# EAGLE board Ryan's board (EAGLE 5.12)
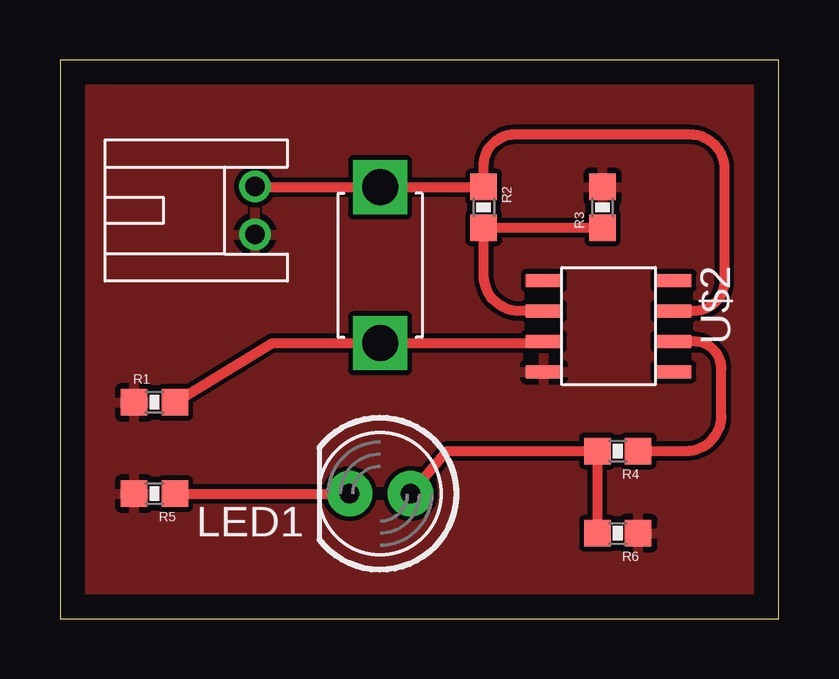
[diagram p0: board, top side]

Size 29.95 x 23.29 mm. Coordinates in mm from the lower left corner, seen from the top.
Outline: 0,0 29.95,0 29.95,23.29 0,23.29 0,0
Copper layers (1*16): Top 0.035mm / dielectric 1.5mm / Bottom 0.035mm
Design rules "default": minimum track width 10mil, minimum drill 24mil, track to track 8mil, track to pad 8mil, pad to pad 8mil, via to via 8mil, smd to smd 8mil, copper to edge 40mil, drill to drill 8mil, minimum pad ring 10mil, minimum via ring 8mil, stop-mask expansion 4mil, vias tented up to drill 0mil, thermal gap 10mil

## Footprints (pad centres in the part's own frame; a part is rotated, then mirrored left to right if it is on the bottom)
JST-2-PH-TH = drill 0.8 round: 1 -1,-6.35; 2 1,-6.35
LED5MM = drill 0.813 pad 1.88 round: A -1.27,0; K 1.27,0
0603 = smd 1.1 x 1.1: 1 -0.85,0; 2 0.85,0
TACTILE_SWITCH = drill 1.5 square: 1 -3.25,0; 2 3.25,0
SOIC = smd 0.55 x 1.5: 1 -1.905,-2.7; 2 -0.635,-2.7; 3 0.635,-2.7; 4 1.905,-2.7; 5 1.905,2.7; 6 0.635,2.7; 7 -0.635,2.7; 8 -1.905,2.7

## Placement (x,y rotation side)
JP1  [JST-2-PH-TH]  1.78,17.02 90 top
LED1  [LED5MM]  13.33,5.21 180 top
R1  1k  [0603]  3.94,9.02 0 top
R2  1k  [0603]  17.65,17.15 270 top
R3  1k  [0603]  22.61,17.15 90 top
R4  100  [0603]  23.24,6.99 180 top
R5  1k  [0603]  3.94,5.21 180 top
R6  1k  [0603]  23.24,3.56 180 top
U$1  TACTILE_SWITCH  [TACTILE_SWITCH]  13.33,14.73 270 top
U$2  UA741UA741-D(R-PDSO-G8)  [SOIC]  22.86,12.19 270 top

## Library data of the parts
JP1 LED1 R1-R6 U$1 = GibbotV5
U$2 = practice

## Nets
GND: JP1.1 R1.1 R3.2 R5.2 R6.1 U$2.4
N$2: JP1.2 R2.1 U$1.1 U$2.7
N$3: R1.2 U$1.2 U$2.3
N$4: R2.2 R3.1 U$2.2
N$5: R4.1 U$2.6
N$6: LED1.A R4.2 R6.2
N$7: LED1.K R5.1

## Tracks (layer width: path | path; a pad name or v marks a point on that pad's centre or on a via)
GND
  pour Top: 0.89,22.61 29.21,22.61 29.21,0.76 0.76,0.76
N$2
  Top 0.406: JP1.2 arc90 8.16,17.98 U$1.1 13.33,17.99 R2.1 17.65,18.88 arc-90 18.96,20.19 26.24,20.19 arc-90 27.69,18.74 27.69,14.08 arc-90 26.43,12.83 U$2.7
N$3
  Top 0.406: U$2.3 20.16,11.48 U$1.2 8.85,11.48 R1.2
N$4
  Top 0.406: R3.1 R2.2 17.65,14.31 arc90 19.13,12.83 U$2.2
N$5
  Top 0.406: U$2.6 26.41,11.56 arc-90 27.56,10.41 27.56,8.47 arc-90 26.08,6.99 R4.1
N$6
  Top 0.406: LED1.A 16.13,6.99 R4.2 R6.2
N$7
  Top 0.406: R5.1 LED1.K